# Altium PCB VESC_POWER_75100.PcbDoc
Units mm, origin at the board's own origin, x right, y up, seen from the top; angles counter-clockwise.
Board outline 72 x 52 mm, 2 copper layers (Top Layer, Bottom Layer), stack 1.17 mm thick; 50 components, 18 nets, 113 pads, 0 vias.
Unrouted connection lines stored in the file: 2.
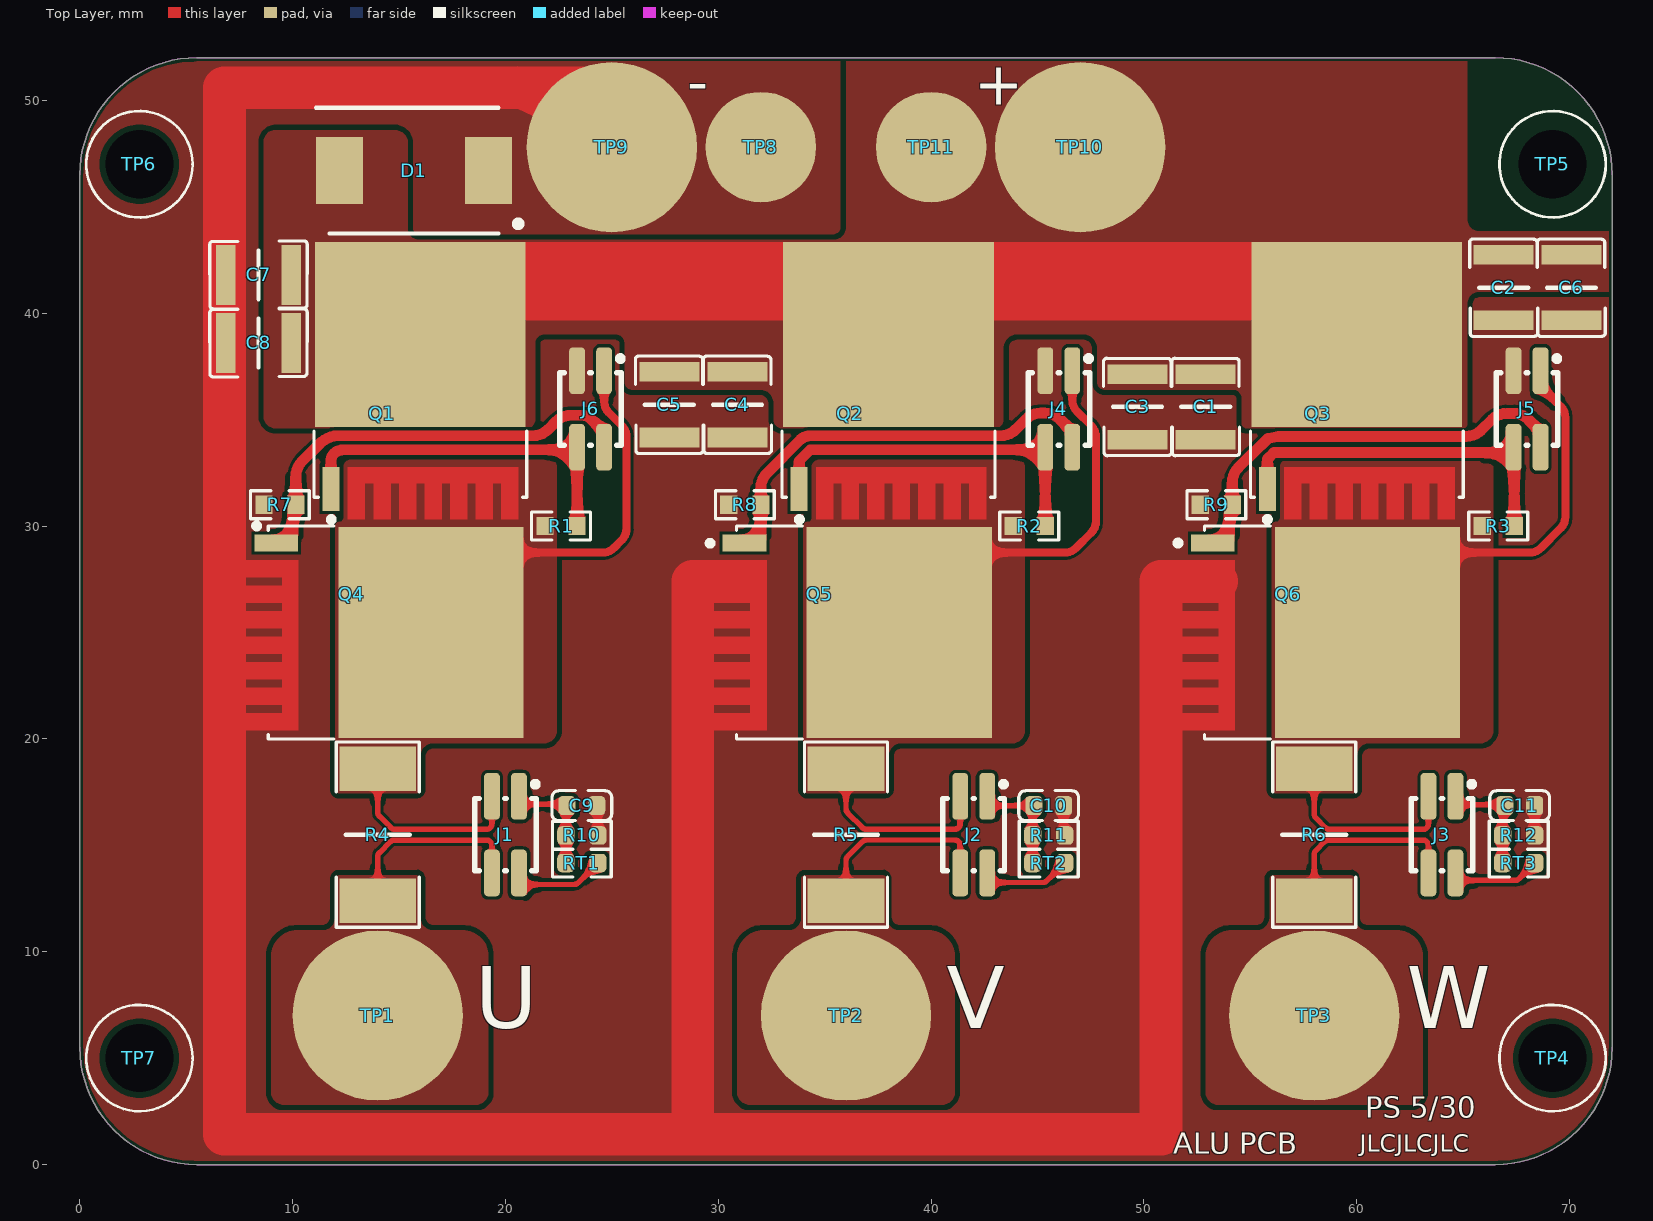
[diagram p0: Top Layer view]
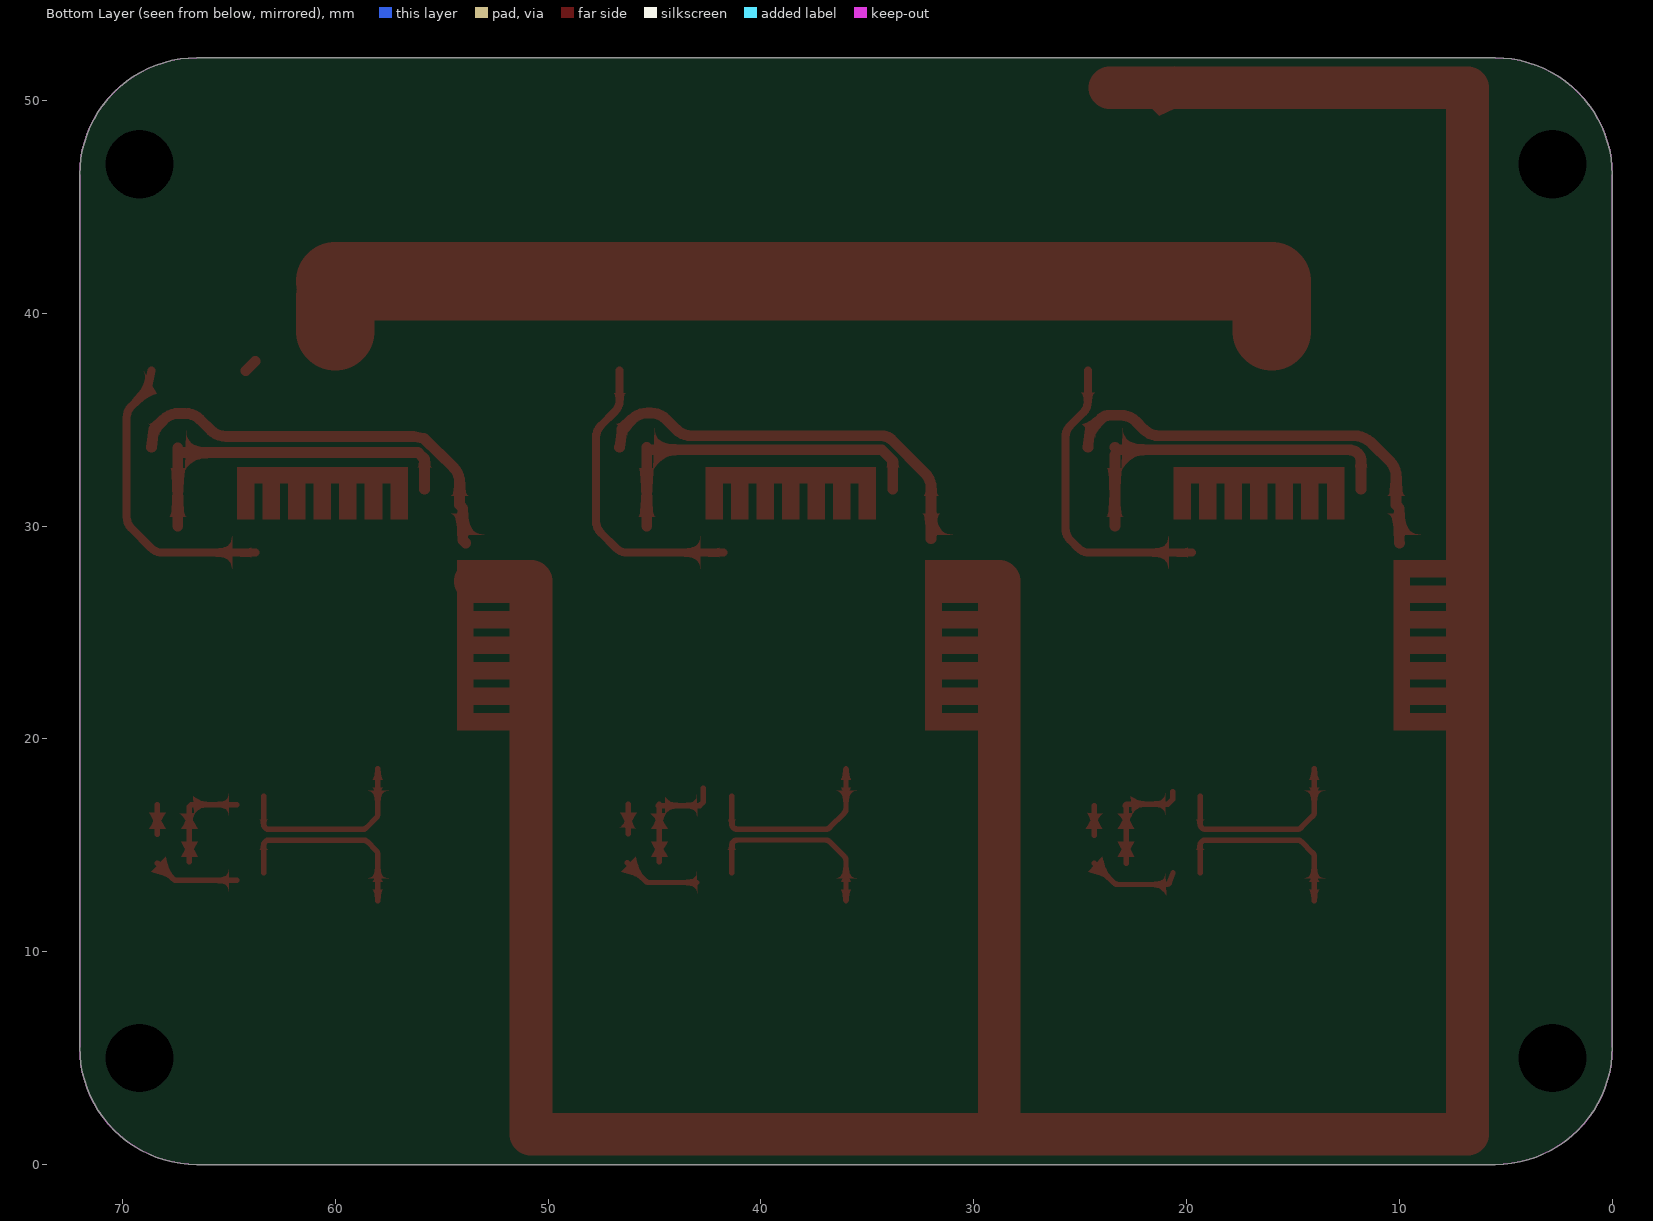
[diagram p1: Bottom Layer view, seen from below]
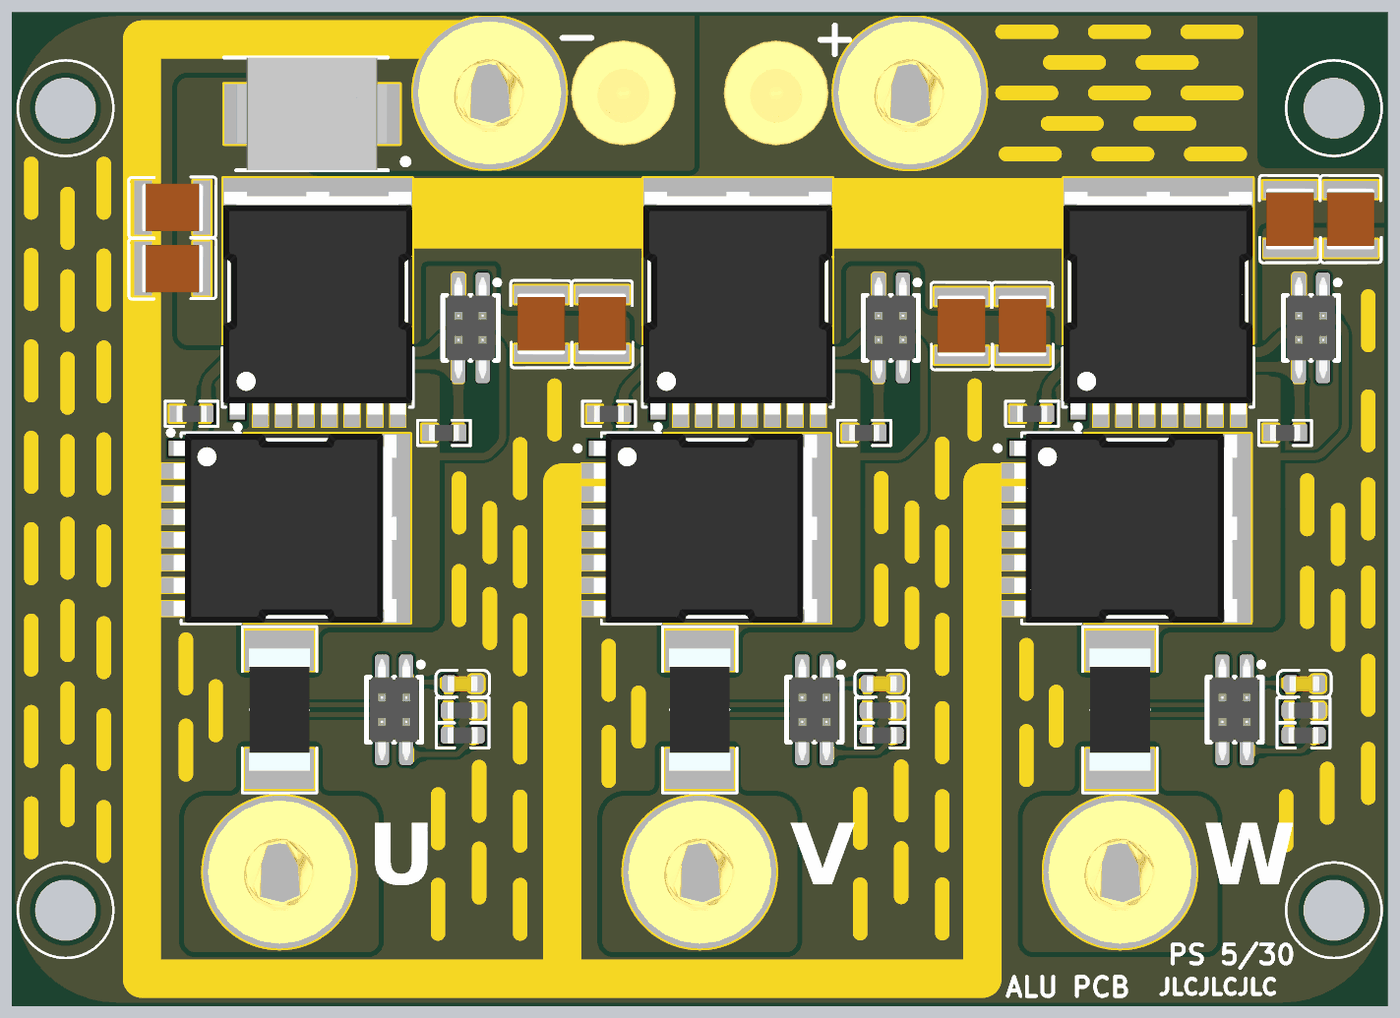
[diagram p2: 3D render of the assembled board from above, using the file's embedded part models]

## Layer stack, top to bottom
Top Solder: solder mask 0.0102, Solder Resist, Dk 3.5
Top Layer: signal copper 0.035
Dielectric 1: core 1.1, Core-024, Dk 4.6
Bottom Layer: signal copper 0.035
Bottom Solder: solder mask 0.0102, Solder Resist, Dk 3.5

## Board outline
0,5.5 ccw(c5.5,5.5) 5.5,0 66.5,0 ccw(c66.5,5.5) 72,5.5 72,46.5 ccw(c66.5,46.5) 66.5,52 5.5,52 ccw(c5.5,46.5) 0,46.5

## Design rules (kind name [scope] priority, off if disabled: settings)
BoardOutlineClearance [All] p1: gap=0.254 ignorepadtopadclearanceinfootprint=FALSE except(0: Arc-SplitContinuation Track-SplitContinuation SMDPad-SplitContinuation THPad-SplitContinuation Via-SplitContinuation Fill-SplitContinuation Poly-SplitContinuation Region-SplitContinuation Text-SplitContinuation; 0.152: Arc-OutlineEdge Track-OutlineEdge SMDPad-OutlineEdge THPad-OutlineEdge Via-OutlineEdge Fill-OutlineEdge Poly-OutlineEdge Region-OutlineEdge Text-OutlineEdge)
Clearance [All] p1: gap=0.152 ignorepadtopadclearanceinfootprint=FALSE except(0.254: Fill-Fill Fill-Poly Fill-Region Fill-Text Fill-Hole Poly-Poly Poly-Region Poly-Text Poly-Hole Region-Region Region-Text Region-Hole)
HoleSize [All] p1: absolutevalues=TRUE maxlimit=5 minlimit=0.025 maxpercent=80.000 minpercent=20.000
HoleToHoleClearance [All] p1: gap=0.229 allowstackedmicrovias=TRUE
MinimumSolderMaskSliver [All] p1: minsoldermaskwidth=0.051
PolygonConnect [All] p1: connectstyle=Direct reliefconductorwidth=0.254 reliefentries=4 polygonreliefangle="90 Angle" airgapwidth=0.254
RoutingVias [All] p1: holewidth=0.711 width=1.27 viastyle="Through Hole" minholewidth=0.711 minwidth=1.27 maxholewidth=0.711 maxwidth=1.27
ShortCircuit ShortCircuit_1 [InComponent('JP1')] p1: allowed=TRUE
ShortCircuit [All] p2: allowed=FALSE
SilkToSilkClearance [All] p1: silktosilkclearance=0
SilkToSolderMaskClearance [IsPad] p1: minsilkscreentomaskgap=0 clearancetoexposedcopper=TRUE
SolderMaskExpansion [All] p1: expansion=0.102 istentingtop=FALSE
SupplyNets "Schematic Supply Nets_2" [InNet('VIN')] p1: voltage=0.000
SupplyNets "Schematic Supply Nets_1" [InNet('GND')] p2: voltage=0.000
SupplyNets "Schematic Supply Nets" [InNet('3V3')] p3: voltage=0.000
Width [All] p1: maxlimit=5.08 minlimit=0.152 preferedwidth=0.254
24 further rules are at their usual default settings.

## Components (designator, comment, footprint, x,y, rotation, side; value= is the part's Value field where it differs from the comment)
C1 "2.2uF/100V" CAPC3225X230N 52.9,35.6 r90 top
C2 "2.2uF/100V" CAPC3225X230N 66.9,41.2 r90 top
C3 "2.2uF/100V" CAPC3225X230N 49.7,35.6 r90 top
C4 "2.2uF/100V" CAPC3225X230N 30.9,35.7 r90 top
C5 "2.2uF/100V" CAPC3225X230N 27.7,35.7 r90 top
C6 "2.2uF/100V" CAPC3225X230N 70.082,41.2 r90 top
C7 "2.2uF/100V" CAPC3225X230N 8.4,41.8 r0 top
C8 "2.2uF/100V" CAPC3225X230N 8.4,38.6 r0 top
C9 "2.2uF/6.3V" C0603 23.589,16.864 r0 top
C10 "2.2uF/6.3V" C0603 45.525,16.864 r0 top
C11 "2.2uF/6.3V" C0603 67.654,16.864 r0 top
D1 "SMCJ75A" DIOM7959X262N 15.7,46.7 r0 top
J1 "PZ127-2-02-S" HDR-SMD_4P-P1.27-V-M-R2-C2-LS5.3 20,15.5 r180 top locked
J2 "PZ127-2-02-S" HDR-SMD_4P-P1.27-V-M-R2-C2-LS5.3 42,15.5 r180 top locked
J3 "PZ127-2-02-S" HDR-SMD_4P-P1.27-V-M-R2-C2-LS5.3 64,15.5 r180 top locked
J4 "PZ127-2-02-S" HDR-SMD_4P-P1.27-V-M-R2-C2-LS5.3 46,35.5 r180 top
J5 "PZ127-2-02-S" HDR-SMD_4P-P1.27-V-M-R2-C2-LS5.3 68,35.5 r180 top
J6 "PZ127-2-02-S" HDR-SMD_4P-P1.27-V-M-R2-C2-LS5.3 24,35.5 r180 top
Q1 "NCEP023N10LL" TOLL 16,37 r90 top locked
Q2 "NCEP023N10LL" TOLL 38,37 r90 top locked
Q3 "NCEP023N10LL" TOLL 60,37 r90 top locked
Q4 "NCEP023N10LL" TOLL 14.5,25 r0 top locked
Q5 "NCEP023N10LL" TOLL 36.5,25 r0 top locked
Q6 "NCEP023N10LL" TOLL 58.5,25 r0 top locked
R1 "5.1K/1%" R0603#1 22.612,30 r0 top
R2 "5.1K/1%" R0603#1 44.612,30 r0 top
R3 "5.1K/1%" R0603#1 66.647,30 r0 top
R4 "5mR/1%" R2512 14,15.5 r90 top locked
R5 "5mR/1%" R2512 36,15.5 r90 top locked
R6 "5mR/1%" R2512 58,15.5 r90 top locked
R7 "5.1K/1%" R0603#1 9.4,31 r0 top
R8 "5.1K/1%" R0603#1 31.247,31 r0 top
R9 "5.1K/1%" R0603#1 53.4,31 r0 top
R10 "10K/1%" R0603#2 23.589,15.464 r180 top
R11 "10K/1%" R0603#2 45.525,15.464 r180 top
R12 "10K/1%" R0603#2 67.607,15.464 r180 top
RT1 "NTC" R0603#2 23.589,14.164 r180 top
RT2 "NTC" R0603#2 45.525,14.164 r180 top
RT3 "NTC" R0603#2 67.607,14.164 r180 top
TP1 "PHA" TP_8x8 14,7 r0 top
TP2 "PHB" TP_8x8 36,7 r0 top
TP3 "PHC" TP_8x8 58,7 r0 top
TP4 "TEST POINT" HOLE-3.2MM_M 69.2,5 r0 top
TP5 "TEST POINT" HOLE-3.2MM_M 69.2,47 r0 top
TP6 "TEST POINT" HOLE-3.2MM_M 2.8,47 r0 top
TP7 "TEST POINT" HOLE-3.2MM_M 2.8,5 r0 top
TP8 "VIN" TP_6x6 32,47.8 r0 top
TP9 "VIN" TP_8x8 25,47.8 r0 top
TP10 "GND" TP_8x8 47,47.8 r0 top
TP11 "GND" TP_6x6 40,47.8 r0 top

## Footprints (in the part's own frame and the unit in brackets; to place one, negate y for a bottom-side part, rotate by r counter-clockwise, add the part's x,y. Pads: shape width x height; smd on the part's side, far side on the other; paste and mask are expansions set on the pad)
C0603 [mm] "C0603"
  rrect50% 0.8x0.9 smd: 1(-0.7,0) 2(0.7,0)
  silkscreen extent -1.41,-0.7 1.4,0.7, body extent -0.8,-0.41 0.8,0.41, height 0.9
CAPC3225X230N [mm]
  rect 0.92x2.82 smd: 1(-1.54,0) 2(1.54,0)
  silkscreen extent -2.3,-1.6 2.28,1.6, body extent -1.6,-1.25 1.6,1.25, height 2.47
DIOM7959X262N [mm]
  rect 2.2x3.15 smd: 1(-3.5,0) 2(3.5,0)
  silkscreen extent -4.6,-2.95 3.97,2.95, body extent -3.97,-2.95 3.97,2.95, height 2.31
HDR-SMD_4P-P1.27-V-M-R2-C2-LS5.3 [mm]
  rrect50% 0.74x2.2 smd paste+0 mask+0.05: 1(-0.635,-1.8) 2(-0.635,1.8) 3(0.635,-1.8) 4(0.635,1.8)
  silkscreen extent -1.52,-2.49 1.45,1.7, body extent -1.27,-2.65 1.27,2.65, height 5.5
HOLE-3.2MM_M [mm]
  round 0 hole 3.2 unplated: 1(0,0)
  silkscreen extent -2.5,-2.5 2.5,2.5
R0603#1 [mm] "R0603"
  rect 0.806x0.864 smd: 1(-0.753,0) 2(0.753,0)
  silkscreen extent -1.38,-0.66 1.39,0.66, body extent -0.79,-0.43 0.79,0.43, height 0.5
R0603#2 [mm] "R0603"
  rrect50% 0.806x0.864 smd: 1(-0.753,0) 2(0.753,0)
  silkscreen extent -1.38,-0.66 1.39,0.66, body extent -0.79,-0.43 0.79,0.43, height 0.5
R2512 [mm]
  rect 2.1x3.6 smd: 1(-3.1,0) 2(3.1,0)
  silkscreen extent -4.35,-1.95 4.35,1.95, body extent -3.2,-1.6 3.2,1.6, height 0.8
TOLL [mm] "TOLL"
  rect 2.063x0.8 smd: 1(-5.269,4.2)
  rect 8.7x9.9 smd: 2(2,0)
  oct 0.025x0.025 smd: 3(-5.46,-0.6)
  round 0.025 smd: 3(-5.46,-0.6)
  Top Layer region: -6.691,3.4 -4.228,3.4 -4.228,-4.6 -6.691,-4.6 -6.691,-3.8 -4.991,-3.8 -4.991,-3.4 -6.691,-3.4 -6.691,-2.6 -4.991,-2.6 -4.991,-2.2 -6.691,-2.2 -6.691,-1.4 -4.991,-1.4 -4.991,-1 -6.691,-1 -6.691,-0.2 -4.991,-0.2 -4.991,0.2 -6.691,0.2 -6.691,1 -4.991,1 -4.991,1.4 -6.691,1.4 -6.691,2.2 -4.991,2.2 -4.991,2.6 -6.691,2.6
  silkscreen extent -6.82,-5 -2.55,5, body extent -6.04,-4.95 5.63,4.95, height 2.3
TP_6x6 [mm] "TP_6x6"
  round 5.2 smd: 1(0,0)
  body extent -2.75,-2.75 2.74,2.75, height 6
TP_8x8 [mm] "TP_8X8"
  round 8 smd: 1(0,0)
  body extent -3.75,-3.75 3.74,3.75, height 20

## Part data
C1 C2 C3 C4 C5 C6 C7 C8 C9 C10 C11: library part "CAP NP"
  C1 C2 C3 C4 C5 C6 C7 C8: PCB Footprint=C1206
  C9 C10 C11: PCB Footprint=C0603
D1: "TVS Diode (Uni-directional)", Manufacturer_Name=Bourns, Mouser Part Number=652-SMCJ75A, Arrow Part Number=SMCJ75A, Arrow Price/Stock=https://www.arrow.com/en/products/smcj75a/bourns?region=nac, Datasheet Link=https://www.bourns.com/docs/Product-Datasheets/SMCJ.pdf, Height=2.62mm, Manufacturer_Part_Number=SMCJ75A, Mouser Price/Stock=https://www.mouser.co.uk/ProductDetail/Bourns/SMCJ75A?qs=%252Bf8Cd6aE5bzxrdYbQ%252Bf9mA%3D%3D
J1 J2 J3 J4 J5 J6: Color=黑色, Current Rating (Max)=1A, JLCPCB Part Class="Extended Part", LCSC Part Name="2x2P 间距:1.27mm 方针 立贴", Manufacturer=HCTL(华灿天禄), Operating Temperature Range=-40℃~+105℃, Soldering Temperature(Max)=260℃@10S, Add into BOM=yes, Circluar Pins/Square Pins=方针, Contact Material=黄铜, Convert to PCB=yes, Datasheet=https://atta.szlcsc.com/upload/public/pdf/source/20230609/2ACB07ADC7D4DAF6D292F3D23C037F6C.pdf, Device=PZ127-2-02-S, Insulation Height=1.5mm, Length of End Connection Pin=-, Length of Mating Pin=4mm, Manufacturer Part=PZ127-2-02-S, Mounting Type=立贴, Number of Pins=4P, Number of Rows=双排, Pin Structure=2x2P, Pitch=1.27mm, Row Spacing=1.27mm, Supplier=LCSC, Supplier Footprint=SMD,P=1.27mm, Supplier Part=C3975185, Symbol=PZ127-2-02-S
Q1 Q2 Q3 Q4 Q5 Q6: library part "MOSFET N", PCB Footprint=TOLL
R1 R2 R3 R4 R5 R6 R7 R8 R9 R10 R11 R12: library part RESISTOR
  R1 R2 R3 R7 R8 R9 R10 R11 R12: PCB Footprint=R0603
  R4 R5 R6: PCB Footprint=R3920
TP1 TP2 TP3 TP8 TP9 TP10 TP11: library part "TEST POINT", PCB Footprint=TP_8x8
RT1 RT2 RT3: PCB Footprint=R0603

## Nets (pads, with @x,y where several pads share a name; then routed paths per layer and width w, separated by ;. In a path a pad name is that pad's centre, name@x,y a point inside that pad or via, vN(x,y) a via of type N, cw(c..) or ccw(c..) an arc to the next point about the centre after c; other vN are vias at no path point)
3V3: J1.2 J2.2 J3.2 RT1.1 RT2.1 RT3.1 | length 12.2
  Top Layer w0.254: J1.2 20.82,13.212 20.845,13.196 ccw(c20.979,13.412) 20.979,13.158 23.231,13.158 ccw(c23.231,13.412) 23.41,13.232 RT1.1 ; J2.2@43,13.25 45.248,13.25 ccw(c45.248,13.504) 45.427,13.324 46.077,13.974 RT2.1@46.278,14.175 ; J3.2@64.635,13.351 67.443,13.351 ccw(c67.443,13.605) 67.622,13.425 RT3.1
ADC_TEMP: C9.1 J1.1 R10.2 RT1.2 | length 5.4
  Top Layer w0.254: J1.1@20.652,17.522 20.652,17.159 20.874,16.937 22.815,16.937 C9.1 ; RT1.2 R10.2 C9.1@22.836,16.864
ADC_TEMP2: C10.1 J2.1 R11.2 RT2.2 | length 5.5
  Top Layer w0.254: J2.1@42.7,17.682 42.7,17.038 42.874,16.864 C10.1 ; RT2.2@44.772,14.232 44.772,15.532 C10.1@44.772,16.932
ADC_TEMP3: C11.1 J3.1 R12.2 RT3.2 | length 4.9
  Top Layer w0.254: J3.1@64.634,16.908 66.754,16.908 66.854,16.817 R12.2 RT3.2@66.854,14.217
GHA: J6.4 Q1.1 R1.2 | length 16.6
  Top Layer w0.508: Q1.1 11.8,33.053 cw(c12.308,33.052) 12.137,33.53 cw(c12.443,32.672) 12.443,33.583 23.249,33.583 J6.4 ; R1.2 J6.4@23.365,33.339
GHB: J4.4 Q2.1 R2.2 | length 16.8
  Top Layer w0.508: Q2.1 33.8,33.066 34.317,33.583 35,33.583 45.249,33.583 J4.4@45.309,33.583 ; R2.2 J4.4
GHC: J5.4 Q3.1 R3.2 | length 16.8
  Top Layer w0.508: Q3.1 55.8,33.101 cw(c56.149,33.101) 55.804,33.156 56.093,33.445 cw(c56.149,33.101) 56.149,33.449 J5.4@67.4,33.449 ; R3.2 J5.4@67.4,33.665
GLA: J6.2 Q4.1 R7.2 | length 19.9
  Top Layer w0.508: Q4.1@10,29.2 10.009,29.346 10.009,30.822 R7.2 10.153,32.332 cw(c11.169,32.332) 10.45,33.05 11.257,33.857 cw(c12.242,32.87) 11.784,34.187 cw(c12.118,33.228) 12.118,34.244 21.289,34.244 ccw(c21.289,35.26) 22.007,34.54 22.376,34.91 cw(c23.093,34.19) 23.093,35.206 23.638,35.206 cw(c23.638,34.698) 23.994,35.061 24.519,34.546 J6.2
GLB: J4.2 Q5.1 R8.2 | length 19.6
  Top Layer w0.508: Q5.1@32,29.4 32,31.779 cw(c33.016,31.779) 32.297,32.497 33.851,34.051 cw(c34.317,33.583) 34.317,34.244 43.259,34.244 ccw(c43.259,35.26) 43.977,34.54 44.452,35.015 cw(c45.169,34.296) 45.169,35.312 45.332,35.312 cw(c45.332,34.296) 46.05,35.015 J4.2@46.338,34.727 ; J4.2@46.339,34.726 46.519,34.546 J4.2
GLC: J5.2 Q6.1 R9.2 | length 19.9
  Top Layer w0.508: Q6.1@53.863,29.2 54.009,29.346 54.009,30.822 R9.2 54.153,32.047 cw(c55.169,32.047) 54.449,32.765 cw(c54.808,32.405) 54.453,32.768 55.824,34.11 56.317,34.211 65.133,34.211 ccw(c65.133,35.227) 65.851,34.508 66.339,34.996 cw(c67.056,34.277) 67.056,35.293 67.351,35.293 cw(c67.351,34.277) 68.069,34.996 J5.2@68.338,34.727 ; J5.2@68.339,34.726 68.519,34.546 J5.2
GND: C1.1 C2.1 C3.1 C4.1 C5.1 C6.1 C7.1 C8.1 C9.2 C10.2 C11.2 D1.2 J4.3 J5.3 J6.3 Q4.3 Q5.3 Q6.3 R7.1 R8.1 R9.1 R10.1 R11.1 R12.1 TP8.1 TP9.1 | length 305.2
  Top Layer w0.254: R10.1 C9.2@24.342,16.864 ; R11.1@46.225,15.532 C10.2@46.225,16.932 ; R12.1@68.354,15.517 C11.2@68.354,16.917
  Top Layer w2: 6.8,6.945 6.8,1.611 ; 6.8,12.279 6.8,1.611 ; 6.8,15.835 6.8,1.611 ; 6.8,21.169 6.8,1.611 ; 6.8,26.503 6.8,1.611 ; 6.8,30.059 6.8,1.611 ; 10.787,50.6 6.8,50.6 ; 13.454,1.414 6.8,1.414 ; 13.473,50.6 6.8,50.6 ; 16.121,50.6 6.8,50.6 ; TP9.1@23.6,50.6 22.9,50.6 20.585,50.6 6.8,50.6 ; 29.456,1.414 28.8,1.414 ; 31.105,27.4 28.8,27.4 28.8,22.947 28.8,19.391 28.8,14.057 28.8,6.945 28.8,3.389 28.8,1.414 ; 36.568,1.414 47.236,1.414 50.8,1.414 ; 38.346,1.414 28.8,1.414 ; 50.8,3.389 50.8,1.414 ; 53.41,27.4 50.8,27.4 50.8,24.725 50.8,12.279 50.8,8.723 50.8,1.414 ; 6.8,1.414 24.122,1.414 28.8,1.414 ; 6.8,1.414 6.8,1.611 ; 6.8,1.611 6.8,33.615 6.8,45.6 6.8,50.6
PHA: J1.4 R4.1 TP1.1 | length 9.2
  Top Layer w0.254: R4.1 14,14.468 cw(c14.254,14.468) 14.074,14.647 14.597,15.17 cw(c14.776,14.99) 14.776,15.244 19.111,15.244 cw(c19.111,14.99) 19.365,14.99 J1.4
PHB: J2.4 R5.1 TP2.1 | length 9.1
  Top Layer w0.254: R5.1 36,14.295 cw(c36.254,14.295) 36.074,14.474 36.775,15.175 cw(c36.954,14.995) 36.954,15.249 41.111,15.249 cw(c41.111,14.995) 41.365,14.995 J2.4
PHC: J3.4 R6.1 TP3.1 | length 9.3
  Top Layer w0.254: R6.1 58,14.57 cw(c58.254,14.57) 58.074,14.749 58.493,15.168 cw(c58.672,14.988) 58.672,15.242 63.111,15.242 cw(c63.111,14.988) 63.365,14.988 J3.4
SHA: J1.3 J6.1 Q1.3 Q4.2 R1.1 R4.2 | length 23.5
  Top Layer w0.254: R4.2 14,16.548 ccw(c14.254,16.548) 14.073,16.369 14.617,15.826 ccw(c14.796,16.006) 14.796,15.752 19.111,15.752 ccw(c19.111,16.006) 19.365,16.006 J1.3
  Top Layer w0.381: Q4.2@19.75,28.75 24.559,28.75 ccw(c24.559,29.512) 25.097,28.973 25.464,29.34 ccw(c24.925,29.878) 25.687,29.878 25.687,34.179 ccw(c24.925,34.179) 25.464,34.718 24.859,35.323 cw(c25.397,35.862) 24.635,35.862 J6.1
SHB: J2.3 J4.1 Q2.3 Q5.2 R2.1 R5.2 | length 23.3
  Top Layer w0.254: R5.2 36,16.705 ccw(c36.254,16.705) 36.073,16.527 36.769,15.831 ccw(c36.948,16.011) 36.948,15.757 41.111,15.757 ccw(c41.111,16.011) 41.365,16.011 J2.3
  Top Layer w0.381: Q5.2@41.75,28.75 46.273,28.75 ccw(c46.273,29.512) 46.811,28.973 47.522,29.684 ccw(c46.983,30.222) 47.745,30.222 47.745,34.175 ccw(c46.983,34.175) 47.522,34.714 46.858,35.377 cw(c47.397,35.916) 46.635,35.916 J4.1
SHC: J3.3 J5.1 Q3.3 Q6.2 R3.1 R6.2 | length 23.4
  Top Layer w0.254: R6.2 58,16.469 ccw(c58.254,16.469) 58.073,16.291 58.54,15.824 ccw(c58.719,16.004) 58.719,15.75 63.111,15.75 ccw(c63.111,16.004) 63.365,16.004 J3.3
  Top Layer w0.381: Q6.2@63.75,28.75 68.115,28.75 ccw(c68.115,29.512) 68.654,28.973 69.577,29.896 ccw(c69.038,30.435) 69.8,30.433 69.8,35.089 ccw(c69.038,35.089) 69.577,35.628 68.815,36.39 J5.1
VIN: C1.2 C2.2 C3.2 C4.2 C5.2 C6.2 C7.2 C8.2 D1.1 Q1.2 Q2.2 Q3.2 TP10.1 TP11.1 | length 51.1
  Top Layer w0.5: 22.344,42.505 23.349,41.5 23.365,41.484 23.365,40.886 23.252,40.773 23.252,40.735 23.279,40.708 ; 23.233,40.727 23.233,40.7 23.365,40.568 ; Q3.2@63.75,37.75 Q3.2@64.2,37.3
  Top Layer w3.7: Q1.2@16,39.15 16,40 16,41.5 17.5,41.5 19,41.5 20.5,41.5 23.349,41.5 25.9,41.5 27.678,41.5 32.123,41.5 33.5,41.5 35,41.5 36.5,41.5 38,41.5 39.5,41.5 41,41.5 42.5,41.5 46.347,41.5 49.014,41.5 51.681,41.5 55.5,41.5 57,41.5 58.5,41.5 Q3.2@60,41.5 ; Q3.2@60,39.15 60,40 Q3.2@60,40.75
pads on no net: TP4.1 TP5.1 TP6.1 TP7.1

## Polygon pours and split planes (outlines as drawn)
GND on Top Layer "GND_L01_P130" (solid, remove dead copper, pour order 130): 0,5.5 ccw(c5.5,5.5) 5.5,0 66.5,0 ccw(c66.5,5.5) 72,5.5 72,46.5 ccw(c66.5,46.5) 66.5,52 5.5,52 ccw(c5.5,46.5) 0,46.5
SHC on Top Layer "SHC_L01_P105" (solid, pour order 105): 56,17.632 56,30 cw(c56.2,30) 56.2,30.2 ccw(c56.2,30.4) 56.4,30.4 56.4,32.787 cw(c56.734,32.787) 56.734,33.121 66.079,33.121 cw(c66.079,32.8) 66.4,32.8 66.4,20.4 cw(c65.8,20.4) 65.8,19.8 60.6,19.8 ccw(c60.6,19.2) 60,19.2 60,17.632 cw(c59.818,17.632) 59.818,17.45 56.182,17.45 cw(c56.182,17.632)
SHB on Top Layer "SHB_L01_P103" (solid, pour order 103): 34,17.632 34,30 cw(c34.2,30) 34.2,30.2 ccw(c34.2,30.4) 34.4,30.4 34.4,32.787 cw(c34.734,32.787) 34.734,33.121 44.079,33.121 cw(c44.079,32.8) 44.4,32.8 44.4,20.4 cw(c43.8,20.4) 43.8,19.8 38.6,19.8 ccw(c38.6,19.2) 38,19.2 38,17.632 cw(c37.818,17.632) 37.818,17.45 34.182,17.45 cw(c34.182,17.632)
SHA on Top Layer "SHA_L01_P102" (solid, pour order 102): 12,17.632 12,30 cw(c12.2,30) 12.2,30.2 ccw(c12.2,30.4) 12.4,30.4 12.4,32.787 cw(c12.734,32.787) 12.734,33.121 22.079,33.121 cw(c22.079,32.8) 22.4,32.8 22.4,20.4 cw(c21.8,20.4) 21.8,19.8 16.6,19.8 ccw(c16.6,19.2) 16,19.2 16,17.632 cw(c15.818,17.632) 15.818,17.45 12.182,17.45 cw(c12.182,17.632)
VIN on Top Layer "Top Layer-VIN" (solid, remove dead copper, pour order 128): 8.647,35.153 ccw(c9.2,35.153) 9.2,34.6 21,34.6 ccw(c21,35) 21.4,35 21.4,38.6 cw(c21.8,38.6) 21.8,39 25.2,39 cw(c25.2,38.6) 25.6,38.6 25.6,36.8 ccw(c26,36.8) 26,36.4 32,36.4 cw(c32,35.8) 32.6,35.8 32.6,35 ccw(c33,35) 33,34.6 43,34.6 ccw(c43,35) 43.4,35 43.4,38.4 cw(c44,38.4) 44,39 47.2,39 cw(c47.2,38.4) 47.8,38.4 47.8,36.8 ccw(c48.2,36.8) 48.2,36.4 54.2,36.4 cw(c54.2,36) 54.6,36 54.6,34.8 ccw(c54.8,34.8) 54.8,34.6 65,34.6 ccw(c65,34.8) 65.2,34.8 65.2,40.482 cw(c65.718,40.482) 65.718,41 71.833,41 71.833,43.859 65.718,43.859 cw(c65.718,44.377) 65.2,44.377 65.2,52 36,52 36,44 cw(c35.459,44) 35.459,43.459 15.918,43.459 cw(c15.918,43.977) 15.4,43.977 15.4,48 ccw(c14.8,48) 14.8,48.6 9.2,48.6 ccw(c9.2,48.047) 8.647,48.047
PHA on Top Layer "PHA_L01_P096" (solid, pour order 96): 9,9.8 cw(c10.2,9.8) 10.2,11 11.4,11 ccw(c11.4,11.6) 12,11.6 12,13.4 cw(c12.2,13.4) 12.2,13.6 15.8,13.6 cw(c15.8,13.4) 16,13.4 16,11.6 ccw(c16.6,11.6) 16.6,11 18,11 cw(c18,9.8) 19.2,9.8 19.2,3.4 cw(c18.6,3.4) 18.6,2.8 9.6,2.8 cw(c9.6,3.4) 9,3.4
PHB on Top Layer "PHB_L01_P097" (solid, pour order 97): 30.9,9.8 cw(c32.1,9.8) 32.1,11 33.3,11 ccw(c33.3,11.6) 33.9,11.6 33.9,13.4 cw(c34.1,13.4) 34.1,13.6 37.7,13.6 cw(c37.7,13.4) 37.9,13.4 37.9,11.6 ccw(c38.5,11.6) 38.5,11 39.9,11 cw(c39.9,9.8) 41.1,9.8 41.1,3.4 cw(c40.5,3.4) 40.5,2.8 31.5,2.8 cw(c31.5,3.4) 30.9,3.4
PHC on Top Layer "PHC_L01_P101" (solid, pour order 101): 52.9,9.8 cw(c54.1,9.8) 54.1,11 55.3,11 ccw(c55.3,11.6) 55.9,11.6 55.9,13.4 cw(c56.1,13.4) 56.1,13.6 59.7,13.6 cw(c59.7,13.4) 59.9,13.4 59.9,11.6 ccw(c60.5,11.6) 60.5,11 61.9,11 cw(c61.9,9.8) 63.1,9.8 63.1,3.4 cw(c62.5,3.4) 62.5,2.8 53.5,2.8 cw(c53.5,3.4) 52.9,3.4

## Keep-outs
Keep-Out Layer:
  lines w0.025: 66.5,0 ccw(c66.5,5.5) 72,5.5 72,46.5 ccw(c66.5,46.5) 66.5,52 ; 66.5,0 5.5,0 cw(c5.5,5.5) 0,5.5 0,46.5 cw(c5.5,46.5) 5.5,52 66.5,52 ; 66.5,52 66.5,52

## Silkscreen, mask and mechanical layers (free items; w line width, h text height)
Top Overlay:
  circle w0.3: c20.6,44.2 r0.15
  text "-" at 28.534,49.9 h2
  text "+" at 42.034,49.8 h2
  text "U" at 18.582,5.442 h5
  text "V" at 40.728,5.442 h5
  text "W" at 62.345,5.442 h5
  text "PS 5/30" at 60.4,2.2 h1
  text "JLCJLCJLC" at 60.134,0.6 h0.8
  text "ALU PCB" at 51.368,0.5 h1
Top Solder:
  lines w0.762: 1,8.046 1,10.586 ; 1,12.831 1,15.371 ; 1,17.617 1,20.157 ; 1,22.402 1,24.942 ; 1,27.187 1,29.727 ; 1,31.972 1,34.512 ; 1,36.758 1,39.298 ; 1,41.543 1,44.083 ; 2.904,9.739 2.904,12.279 ; 2.904,14.057 2.904,16.597 ; 2.904,18.375 2.904,20.915 ; 2.904,22.693 2.904,25.233 ; 2.904,27.011 2.904,29.551 ; 2.904,31.329 2.904,33.869 ; 2.904,35.647 2.904,38.187 ; 2.904,39.965 2.904,42.505 ; 4.8,7.853 4.8,10.393 ; 4.8,12.666 4.8,15.206 ; 4.8,17.479 4.8,20.019 ; 4.8,22.292 4.8,24.832 ; 4.8,27.104 4.8,29.644 ; 4.8,31.917 4.8,34.457 ; 4.8,36.73 4.8,39.27 ; 4.8,41.543 4.8,44.083 ; 9.1,12.117 9.1,14.657 ; 9.1,16.63 9.1,19.17 ; 10.659,14.177 10.659,16.717 ; 22.3,3.781 22.3,6.321 ; 22.3,8.521 22.3,11.061 ; 23.4,20.21 23.4,22.75 ; 23.4,25.06 23.4,27.6 ; 24.45,5.679 24.45,8.219 ; 24.45,9.958 24.45,12.498 ; 25.011,19.01 25.011,21.55 ; 25.011,23.51 25.011,26.05 ; 26.6,3.781 26.6,6.321 ; 26.6,8.397 26.6,10.937 ; 26.6,13.013 26.6,15.553 ; 26.6,17.628 26.6,20.168 ; 26.6,22.244 26.6,24.784 ; 26.6,26.86 26.6,29.4 ; 28.4,29.93 28.4,32.47 ; 31.234,11.784 31.234,14.324 ; 31.234,16.297 31.234,18.837 ; 32.793,13.845 32.793,16.385 ; 44.4,3.8 44.4,6.34 ; 44.4,8.54 44.4,11.08 ; 45.5,20.229 45.5,22.769 ; 45.5,25.079 45.5,27.619 ; 46.55,5.698 46.55,8.238 ; 46.55,9.977 46.55,12.517 ; 47.111,19.029 47.111,21.569 ; 47.111,23.529 47.111,26.069 ; 48.7,3.8 48.7,6.34 ; 48.7,8.416 48.7,10.956 ; 48.7,13.032 48.7,15.572 ; 48.7,17.647 48.7,20.187 ; 48.7,22.263 48.7,24.803 ; 48.7,26.879 48.7,29.419 ; 50.4,29.93 50.4,32.47 ; 51.853,47.8 54.393,47.8 ; 51.853,51 54.393,51 ; 52.034,44.6 54.574,44.6 ; 53.1,11.83 53.1,14.37 ; 53.1,16.343 53.1,18.883 ; 54.23,46.2 56.77,46.2 ; 54.348,49.4 56.888,49.4 ; 54.659,13.89 54.659,16.43 ; 56.701,47.8 59.241,47.8 ; 56.701,51 59.241,51 ; 56.882,44.6 59.422,44.6 ; 59.078,46.2 61.618,46.2 ; 59.196,49.4 61.736,49.4 ; 61.549,47.8 64.089,47.8 ; 61.549,51 64.089,51 ; 61.73,44.6 64.27,44.6 ; 66.7,8.423 66.7,10.963 ; 67.8,20.112 67.8,22.652 ; 67.8,24.962 67.8,27.502 ; 68.85,9.86 68.85,12.4 ; 69.411,18.912 69.411,21.452 ; 69.411,23.412 69.411,25.952 ; 71,10.898 71,13.438 ; 71,15.514 71,18.054 ; 71,20.13 71,22.67 ; 71,24.746 71,27.286 ; 71,29.362 71,31.902 ; 71,34.6 71,37.14
Mechanical 1:
  lines w0.127: 0.1,5.5 ccw(c5.6,5.5) 5.6,0 66.6,0 ccw(c66.6,5.5) 72.1,5.5 72.1,46.5 ccw(c66.6,46.5) 66.6,52 5.6,52 ccw(c5.6,46.5) 0.1,46.5 0.1,5.5
Drill Drawing:
  lines w0.254: 3.618,67.83 5.018,67.83 4.318,66.43 3.618,67.83
  lines w0.381: 2.349,65.486 90.771,65.486 ; 2.349,68.634 90.771,68.634 ; 10.446,62.337 10.446,71.783 ; 16.605,62.337 16.605,71.783 ; 31.236,62.337 31.236,71.783 ; 37.515,62.337 37.515,71.783 ; 46.656,62.337 46.656,71.783 ; 63.953,62.337 63.953,71.783 ; 71.442,62.337 71.442,71.783 ; 81.228,62.337 81.228,71.783 ; 2.349,62.337 90.771,62.337 90.771,71.783 2.349,71.783 2.349,62.337
  text "Symbol" at 4.239,69.579 h1.83
  text "Count" at 11.39,69.579 h1.83
  text "Hole Size" at 17.549,69.579 h1.83
  text "Plated" at 32.181,69.579 h1.83
  text "Hole Type" at 38.46,69.579 h1.83
  text "Drill Layer Pair" at 47.601,69.579 h1.83
  text "Via/Pad" at 64.898,69.579 h1.83
  text "Pad Shape" at 72.387,69.579 h1.83
  text "Template" at 82.173,69.579 h1.83
  text "4" at 11.39,66.43 h1.52
  text "3.200mm (125.98mil)" at 17.549,66.43 h1.52
  text "NPTH" at 32.181,66.43 h1.52
  text "Round" at 38.46,66.43 h1.52
  text "Top Layer - Bottom Layer" at 47.601,66.43 h1.52
  text "Pad" at 64.898,66.43 h1.52
  text "Rounded" at 72.387,66.43 h1.52
  text "c0hn320" at 82.173,66.43 h1.52
  text "4 Total" at 11.39,63.282 h1.52

## Text inside footprints (layer, text, board x,y; h text height)
C9: Mechanical 8 "1" at 22.635,16.864 h0.64; Mechanical 8 "2" at 24.035,16.864 h0.64
C10: Mechanical 8 "1" at 44.571,16.864 h0.64; Mechanical 8 "2" at 45.971,16.864 h0.64
C11: Mechanical 8 "1" at 66.7,16.864 h0.64; Mechanical 8 "2" at 68.1,16.864 h0.64
Q1: Mechanical 8 "1" at 11.592,31.15 h0.64 r90; Mechanical 8 "3" at 16.392,31.05 h0.64 r90; Mechanical 8 "2" at 16.762,39.15 h0.64 r180
Q2: Mechanical 8 "1" at 33.592,31.15 h0.64 r90; Mechanical 8 "3" at 38.392,31.05 h0.64 r90; Mechanical 8 "2" at 38.762,39.15 h0.64 r180
Q3: Mechanical 8 "2" at 60.762,39.15 h0.64 r180; Mechanical 8 "3" at 60.392,31.05 h0.64 r90; Mechanical 8 "1" at 55.592,31.15 h0.64 r90
Q4: Mechanical 8 "1" at 8.65,29.408 h0.64; Mechanical 8 "3" at 8.55,24.608 h0.64; Mechanical 8 "2" at 16.65,24.238 h0.64 r90
Q5: Mechanical 8 "2" at 38.65,24.238 h0.64 r90; Mechanical 8 "3" at 30.55,24.608 h0.64; Mechanical 8 "1" at 30.65,29.408 h0.64
Q6: Mechanical 8 "2" at 60.65,24.238 h0.64 r90; Mechanical 8 "3" at 52.55,24.608 h0.64; Mechanical 8 "1" at 52.65,29.408 h0.64
R1: Mechanical 8 "2" at 24.12,29.8 h0.64; Mechanical 8 "1" at 22.52,29.8 h0.64
R2: Mechanical 8 "1" at 44.52,29.8 h0.64; Mechanical 8 "2" at 46.12,29.8 h0.64
R3: Mechanical 8 "2" at 68.155,29.8 h0.64; Mechanical 8 "1" at 66.555,29.8 h0.64
R7: Mechanical 8 "2" at 10.908,30.8 h0.64; Mechanical 8 "1" at 9.308,30.8 h0.64
R8: Mechanical 8 "2" at 32.755,30.8 h0.64; Mechanical 8 "1" at 31.155,30.8 h0.64
R9: Mechanical 8 "2" at 54.908,30.8 h0.64; Mechanical 8 "1" at 53.308,30.8 h0.64
R10: Mechanical 8 "2" at 22.081,15.664 h0.64 r180; Mechanical 8 "1" at 23.971,27.952 h0.64 r180
R11: Mechanical 8 "1" at 45.617,15.664 h0.64 r180; Mechanical 8 "2" at 44.017,15.664 h0.64 r180
R12: Mechanical 8 "2" at 66.099,15.664 h0.64 r180; Mechanical 8 "1" at 67.699,15.664 h0.64 r180
RT1: Mechanical 8 "1" at 23.681,14.364 h0.64 r180; Mechanical 8 "2" at 22.081,14.364 h0.64 r180
RT2: Mechanical 8 "1" at 45.617,14.364 h0.64 r180; Mechanical 8 "2" at 44.017,14.364 h0.64 r180
RT3: Mechanical 8 "1" at 67.699,14.364 h0.64 r180; Mechanical 8 "2" at 66.099,14.364 h0.64 r180
TP1: Mechanical 8 "1" at 12.222,7 h0.64
TP2: Mechanical 8 "1" at 34.222,7 h0.64
TP3: Mechanical 8 "1" at 56.222,7 h0.64
TP8: Mechanical 8 "1" at 30.222,47.8 h0.64
TP9: Mechanical 8 "1" at 23.222,47.8 h0.64
TP10: Mechanical 8 "1" at 45.222,47.8 h0.64
TP11: Mechanical 8 "1" at 38.222,47.8 h0.64